# Altium PCB layout.PcbDoc (part 11 of 11)
Units mil, origin at the board's own origin, x right, y up, seen from the top; angles counter-clockwise.
Board outline 3543.31 x 3149.61 mil, 2 copper layers (Top Layer, Bottom Layer); 78 components, 73 nets, 327 pads, 143 vias.
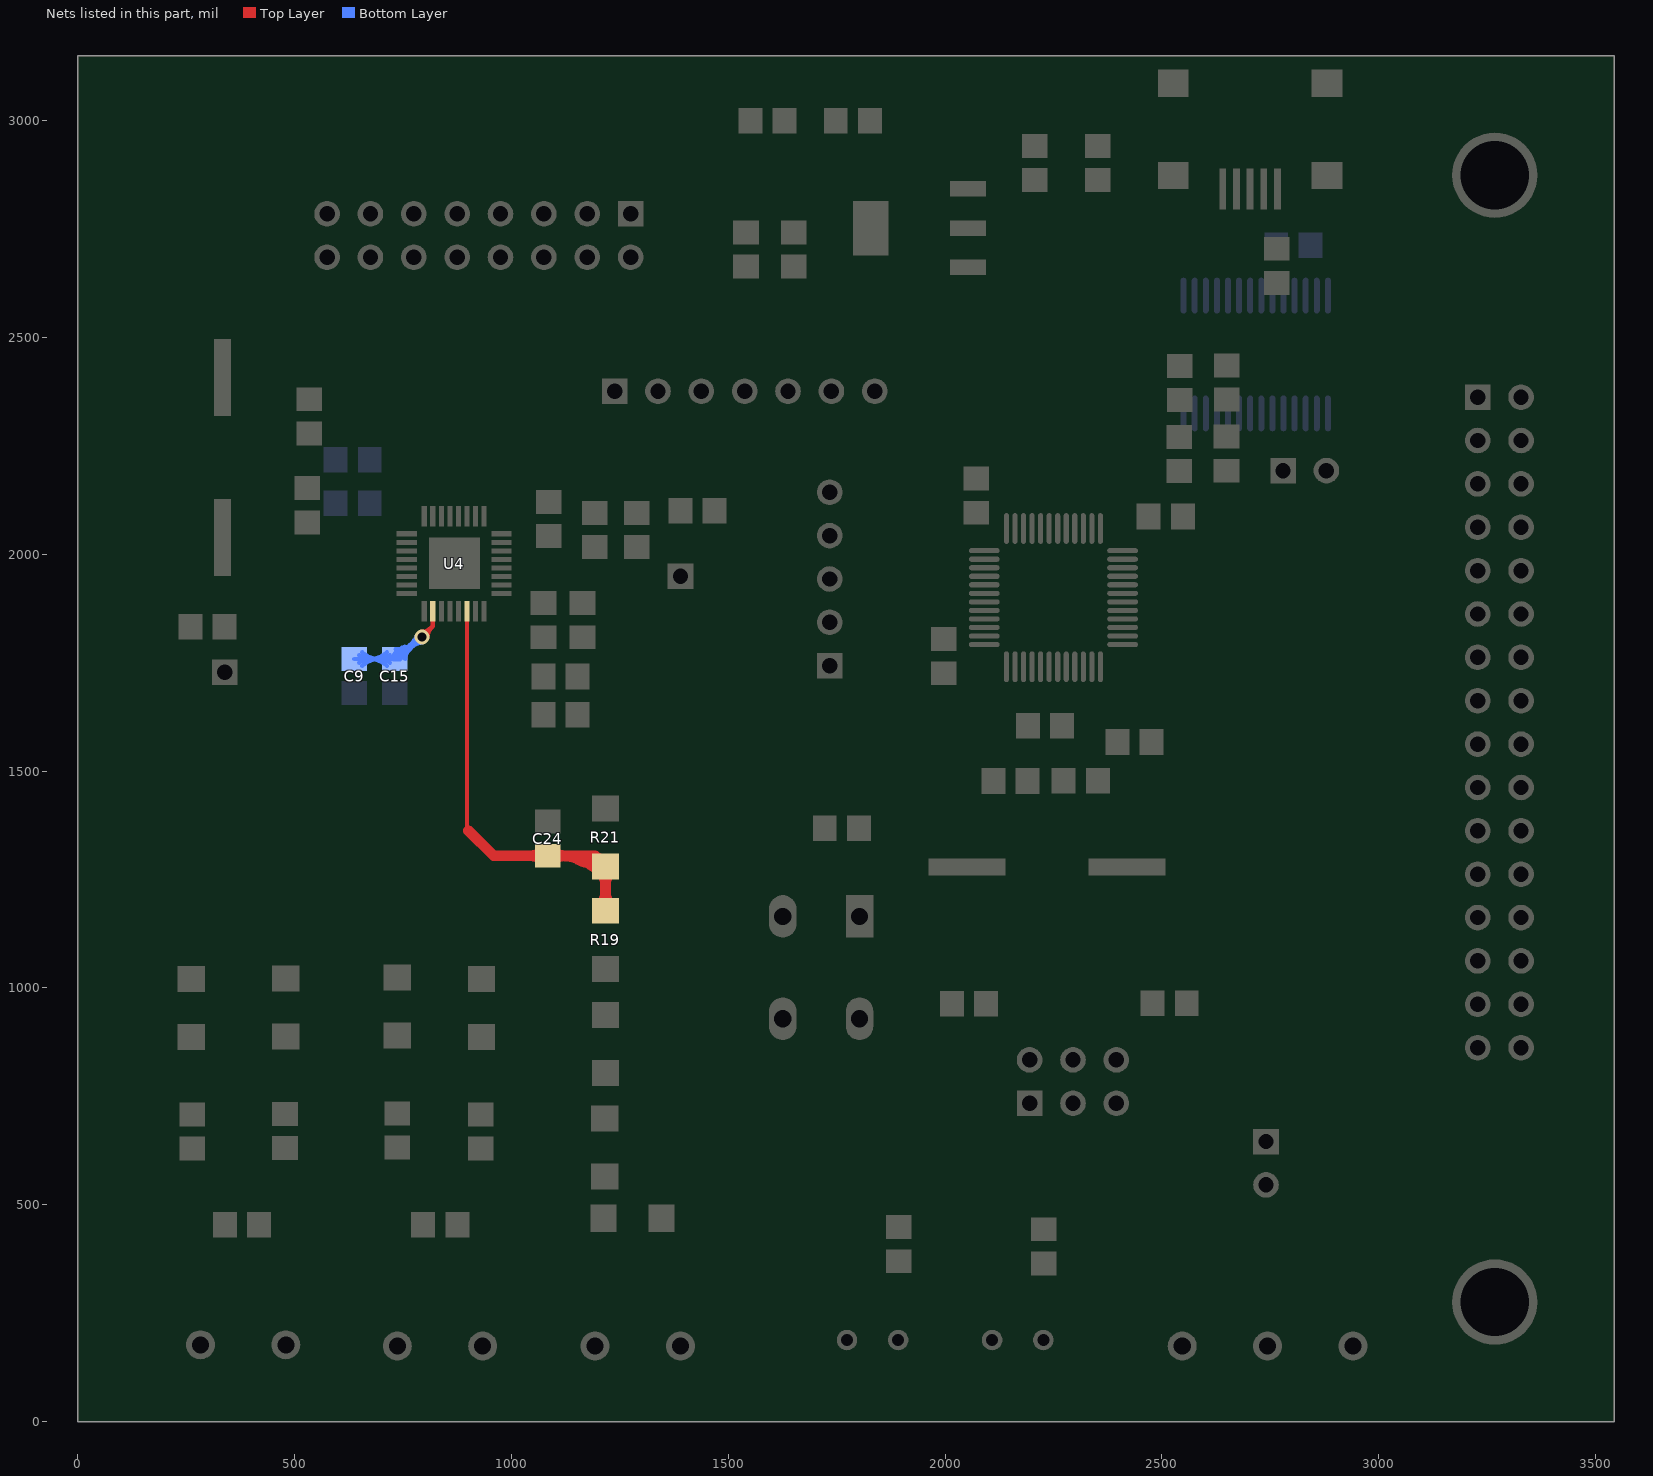
[diagram p11: the nets of this part, all layers, seen from the top]

## Via types
v1: diameter 35, hole 20, Top Layer to Bottom Layer, tented both sides, 113 vias
v2: diameter 35, hole 20, Top Layer to Bottom Layer, 28 vias
v3: diameter 35.43, hole 35.43, Top Layer to Bottom Layer, 2 vias

## Nets (pads, with @x,y where several pads share a name; then routed paths per layer and width w, separated by ;. In a path a pad name is that pad's centre, name@x,y a point inside that pad or via, vN(x,y) a via of type N, cw(c..) or ccw(c..) an arc to the next point about the centre after c; other vN are vias at no path point) (continued)
VAP: C24.1 R19.2 R21.2 U4.14 | length 3472.2
  Top Layer w10: 897.5,1371.05 U4.14@897.5,1869.06
  Top Layer w25: 901.32,1362.52 959.21,1304.63 C24.1@1084,1304.63 1192.51,1304.63 R21.2@1217,1280.14 R19.2@1217,1177.86 ; 1045.68,1304.63 cw(c1045.68,1268.27) C24.1@1071.38,1293.98 ; 1045.68,1304.63 ccw(c1045.68,1340.99) C24.1@1071.38,1315.28 ; 1045.68,1304.63 cw(c1045.68,1268.27) C24.1@1071.38,1293.98 ; 1045.68,1304.63 ccw(c1045.68,1340.99) C24.1@1071.38,1315.28 ; 1045.68,1304.63 cw(c1045.68,1268.27) C24.1@1071.38,1293.98 ; 1045.68,1304.63 ccw(c1045.68,1340.99) C24.1@1071.38,1315.28 ; 1045.68,1304.63 cw(c1045.68,1268.27) C24.1@1071.38,1293.98 ; 1045.68,1304.63 ccw(c1045.68,1340.99) C24.1@1071.38,1315.28 ; 1045.68,1304.63 cw(c1045.68,1268.27) C24.1@1071.38,1293.98 ; 1045.68,1304.63 ccw(c1045.68,1340.99) C24.1@1071.38,1315.28 ; C24.1@1096.62,1293.98 cw(c1122.32,1268.27) 1122.32,1304.63 ; C24.1@1096.62,1293.98 cw(c1122.32,1268.27) 1122.32,1304.63 ; C24.1@1096.62,1293.98 cw(c1122.32,1268.27) 1122.32,1304.63 ; C24.1@1096.62,1293.98 cw(c1122.32,1268.27) 1122.32,1304.63 ; C24.1@1096.62,1293.98 cw(c1122.32,1268.27) 1122.32,1304.63 ; C24.1@1096.62,1315.28 ccw(c1122.32,1340.99) 1122.32,1304.63 ; C24.1@1096.62,1315.28 ccw(c1122.32,1340.99) 1122.32,1304.63 ; C24.1@1096.62,1315.28 ccw(c1122.32,1340.99) 1122.32,1304.63 ; C24.1@1096.62,1315.28 ccw(c1122.32,1340.99) 1122.32,1304.63 ; C24.1@1096.62,1315.28 ccw(c1122.32,1340.99) 1122.32,1304.63 ; 1114.25,1304.63 cw(c1114.25,1178.96) R21.2@1203.11,1267.82 ; 1114.25,1304.63 cw(c1114.25,1178.96) R21.2@1203.11,1267.82 ; 1114.25,1304.63 cw(c1114.25,1178.96) R21.2@1203.11,1267.82 ; 1114.25,1304.63 cw(c1114.25,1178.96) R21.2@1203.11,1267.82 ; 1114.25,1304.63 cw(c1114.25,1178.96) R21.2@1203.11,1267.82 ; 1155.19,1295.49 ccw(c1181.18,1340.51) R21.2@1206.83,1295.29 ; 1155.19,1295.49 ccw(c1181.18,1340.51) R21.2@1206.83,1295.29 ; 1155.19,1295.49 ccw(c1181.18,1340.51) R21.2@1206.83,1295.29 ; 1155.19,1295.49 ccw(c1181.18,1340.51) R21.2@1206.83,1295.29 ; 1155.19,1295.49 ccw(c1181.18,1340.51) R21.2@1206.83,1295.29 ; 1155.19,1295.49 ccw(c1181.18,1340.51) R21.2@1206.83,1295.29 ; 1155.19,1295.49 ccw(c1181.18,1340.51) R21.2@1206.83,1295.29 ; 1155.19,1295.49 ccw(c1181.18,1340.51) R21.2@1206.83,1295.29 ; 1155.19,1295.49 ccw(c1181.18,1340.51) R21.2@1206.83,1295.29 ; 1155.19,1295.49 ccw(c1181.18,1340.51) R21.2@1206.83,1295.29 ; 1174.6,1304.63 cw(c1174.6,1239.32) R21.2@1220.78,1285.5 ; 1174.6,1304.63 cw(c1174.6,1239.32) R21.2@1220.78,1285.5 ; 1174.6,1304.63 cw(c1174.6,1239.32) R21.2@1220.78,1285.5 ; 1174.6,1304.63 cw(c1174.6,1239.32) R21.2@1220.78,1285.5 ; 1174.6,1304.63 cw(c1174.6,1239.32) R21.2@1220.78,1285.5 ; R19.2@1204.68,1190.18 ccw(c1174.94,1219.92) 1217,1219.92 ; R19.2@1204.68,1190.18 ccw(c1174.94,1219.92) 1217,1219.92 ; R19.2@1204.68,1190.18 ccw(c1174.94,1219.92) 1217,1219.92 ; R19.2@1204.68,1190.18 ccw(c1174.94,1219.92) 1217,1219.92 ; R19.2@1204.68,1190.18 ccw(c1174.94,1219.92) 1217,1219.92 ; R21.2@1204.68,1267.82 cw(c1174.94,1238.08) 1217,1238.08 ; R21.2@1204.68,1267.82 cw(c1174.94,1238.08) 1217,1238.08 ; R21.2@1204.68,1267.82 cw(c1174.94,1238.08) 1217,1238.08 ; R21.2@1204.68,1267.82 cw(c1174.94,1238.08) 1217,1238.08 ; R21.2@1204.68,1267.82 cw(c1174.94,1238.08) 1217,1238.08 ; 1217,1219.92 ccw(c1259.06,1219.92) R19.2@1229.32,1190.18 ; 1217,1219.92 ccw(c1259.06,1219.92) R19.2@1229.32,1190.18 ; 1217,1219.92 ccw(c1259.06,1219.92) R19.2@1229.32,1190.18 ; 1217,1219.92 ccw(c1259.06,1219.92) R19.2@1229.32,1190.18 ; 1217,1219.92 ccw(c1259.06,1219.92) R19.2@1229.32,1190.18 ; 1217,1238.08 cw(c1259.06,1238.08) R21.2@1229.32,1267.82 ; 1217,1238.08 cw(c1259.06,1238.08) R21.2@1229.32,1267.82 ; 1217,1238.08 cw(c1259.06,1238.08) R21.2@1229.32,1267.82 ; 1217,1238.08 cw(c1259.06,1238.08) R21.2@1229.32,1267.82 ; 1217,1238.08 cw(c1259.06,1238.08) R21.2@1229.32,1267.82
VDDOUT2P5: C9.1 C15.1 U4.10 | length 5372.4
  Top Layer w10: v2(794,1809) 818.76,1833.76 U4.10@818.76,1869.06 ; v2@793.5,1811.45 ccw(c788.71,1834.83) 811.77,1828.66 ; v2@793.5,1811.45 ccw(c788.71,1834.83) 811.77,1828.66 ; v2@793.5,1811.45 ccw(c788.71,1834.83) 811.77,1828.66 ; v2@793.5,1811.45 ccw(c788.71,1834.83) 811.77,1828.66 ; v2@793.5,1811.45 ccw(c788.71,1834.83) 811.77,1828.66 ; v2@793.5,1811.45 ccw(c788.71,1834.83) 811.77,1828.66 ; v2@793.5,1811.45 ccw(c788.71,1834.83) 811.77,1828.66 ; v2@793.5,1811.45 ccw(c788.71,1834.83) 811.77,1828.66 ; v2@793.5,1811.45 ccw(c788.71,1834.83) 811.77,1828.66 ; v2@793.5,1811.45 ccw(c788.71,1834.83) 811.77,1828.66 ; v2@794,1821.5 ccw(c794,1851.68) 815.34,1830.34 ; v2@794,1821.5 ccw(c794,1851.68) 815.34,1830.34 ; v2@794,1821.5 ccw(c794,1851.68) 815.34,1830.34 ; v2@794,1821.5 ccw(c794,1851.68) 815.34,1830.34 ; v2@794,1821.5 ccw(c794,1851.68) 815.34,1830.34 ; v2@796.45,1808.5 cw(c819.83,1803.71) 813.66,1826.77 ; v2@796.45,1808.5 cw(c819.83,1803.71) 813.66,1826.77 ; v2@796.45,1808.5 cw(c819.83,1803.71) 813.66,1826.77 ; v2@796.45,1808.5 cw(c819.83,1803.71) 813.66,1826.77 ; v2@796.45,1808.5 cw(c819.83,1803.71) 813.66,1826.77 ; v2@796.45,1808.5 cw(c819.83,1803.71) 813.66,1826.77 ; v2@796.45,1808.5 cw(c819.83,1803.71) 813.66,1826.77 ; v2@796.45,1808.5 cw(c819.83,1803.71) 813.66,1826.77 ; v2@796.45,1808.5 cw(c819.83,1803.71) 813.66,1826.77 ; v2@796.45,1808.5 cw(c819.83,1803.71) 813.66,1826.77 ; v2@806.5,1809 cw(c836.68,1809) 815.34,1830.34 ; v2@806.5,1809 cw(c836.68,1809) 815.34,1830.34 ; v2@806.5,1809 cw(c836.68,1809) 815.34,1830.34 ; v2@806.5,1809 cw(c836.68,1809) 815.34,1830.34 ; v2@806.5,1809 cw(c836.68,1809) 815.34,1830.34
  Bottom Layer w10: C9.1@638,1758.37 728,1758.37 C15.1@728.37,1758 ; C15.1@731,1758 743,1758 v2(794,1809) ; C9.1@648.85,1749.49 cw(c670.29,1728.05) 670.29,1758.37 ; C9.1@648.85,1749.49 cw(c670.29,1728.05) 670.29,1758.37 ; C9.1@648.85,1749.49 cw(c670.29,1728.05) 670.29,1758.37 ; C9.1@648.85,1749.49 cw(c670.29,1728.05) 670.29,1758.37 ; C9.1@648.85,1749.49 cw(c670.29,1728.05) 670.29,1758.37 ; C9.1@648.85,1767.25 ccw(c670.29,1788.69) 670.29,1758.37 ; C9.1@648.85,1767.25 ccw(c670.29,1788.69) 670.29,1758.37 ; C9.1@648.85,1767.25 ccw(c670.29,1788.69) 670.29,1758.37 ; C9.1@648.85,1767.25 ccw(c670.29,1788.69) 670.29,1758.37 ; C9.1@648.85,1767.25 ccw(c670.29,1788.69) 670.29,1758.37 ; C9.1@655.92,1742.42 cw(c694.43,1703.91) 694.43,1758.37 ; C9.1@655.92,1742.42 cw(c694.43,1703.91) 694.43,1758.37 ; C9.1@655.92,1742.42 cw(c694.43,1703.91) 694.43,1758.37 ; C9.1@655.92,1742.42 cw(c694.43,1703.91) 694.43,1758.37 ; C9.1@655.92,1742.42 cw(c694.43,1703.91) 694.43,1758.37 ; C9.1@655.92,1774.32 ccw(c694.43,1812.83) 694.43,1758.37 ; C9.1@655.92,1774.32 ccw(c694.43,1812.83) 694.43,1758.37 ; C9.1@655.92,1774.32 ccw(c694.43,1812.83) 694.43,1758.37 ; C9.1@655.92,1774.32 ccw(c694.43,1812.83) 694.43,1758.37 ; C9.1@655.92,1774.32 ccw(c694.43,1812.83) 694.43,1758.37 ; 674.57,1758.37 cw(c674.57,1703.91) C15.1@713.08,1742.42 ; 674.57,1758.37 ccw(c674.57,1812.83) C15.1@713.08,1774.32 ; 674.57,1758.37 cw(c674.57,1703.91) C15.1@713.08,1742.42 ; 674.57,1758.37 ccw(c674.57,1812.83) C15.1@713.08,1774.32 ; 674.57,1758.37 cw(c674.57,1703.91) C15.1@713.08,1742.42 ; 674.57,1758.37 ccw(c674.57,1812.83) C15.1@713.08,1774.32 ; 674.57,1758.37 cw(c674.57,1703.91) C15.1@713.08,1742.42 ; 674.57,1758.37 ccw(c674.57,1812.83) C15.1@713.08,1774.32 ; 674.57,1758.37 cw(c674.57,1703.91) C15.1@713.08,1742.42 ; 674.57,1758.37 ccw(c674.57,1812.83) C15.1@713.08,1774.32 ; 698.71,1758.37 cw(c698.71,1728.05) C15.1@720.15,1749.49 ; 698.71,1758.37 ccw(c698.71,1788.69) C15.1@720.15,1767.25 ; 698.71,1758.37 cw(c698.71,1728.05) C15.1@720.15,1749.49 ; 698.71,1758.37 ccw(c698.71,1788.69) C15.1@720.15,1767.25 ; 698.71,1758.37 cw(c698.71,1728.05) C15.1@720.15,1749.49 ; 698.71,1758.37 ccw(c698.71,1788.69) C15.1@720.15,1767.25 ; 698.71,1758.37 cw(c698.71,1728.05) C15.1@720.15,1749.49 ; 698.71,1758.37 ccw(c698.71,1788.69) C15.1@720.15,1767.25 ; 698.71,1758.37 cw(c698.71,1728.05) C15.1@720.15,1749.49 ; 698.71,1758.37 ccw(c698.71,1788.69) C15.1@720.15,1767.25 ; C15.1@725.97,1760.89 cw(c764.39,1747.08) 753.82,1786.52 ; C15.1@725.97,1760.89 cw(c764.39,1747.08) 753.82,1786.52 ; C15.1@725.97,1760.89 cw(c764.39,1747.08) 753.82,1786.52 ; C15.1@725.97,1760.89 cw(c764.39,1747.08) 753.82,1786.52 ; C15.1@725.97,1760.89 cw(c764.39,1747.08) 753.82,1786.52 ; C15.1@725.97,1760.89 cw(c764.39,1747.08) 753.82,1786.52 ; C15.1@725.97,1760.89 cw(c764.39,1747.08) 753.82,1786.52 ; C15.1@725.97,1760.89 cw(c764.39,1747.08) 753.82,1786.52 ; C15.1@725.97,1760.89 cw(c764.39,1747.08) 753.82,1786.52 ; C15.1@725.97,1760.89 cw(c764.39,1747.08) 753.82,1786.52 ; C15.1@732.97,1770.93 ccw(c732.97,1826.36) 772.16,1787.16 ; C15.1@732.97,1770.93 ccw(c732.97,1826.36) 772.16,1787.16 ; C15.1@732.97,1770.93 ccw(c732.97,1826.36) 772.16,1787.16 ; C15.1@732.97,1770.93 ccw(c732.97,1826.36) 772.16,1787.16 ; C15.1@732.97,1770.93 ccw(c732.97,1826.36) 772.16,1787.16 ; C15.1@732.97,1780.93 ccw(c732.97,1860.5) v2@789.24,1804.24 ; C15.1@732.97,1780.93 ccw(c732.97,1860.5) v2@789.24,1804.24 ; C15.1@732.97,1780.93 ccw(c732.97,1860.5) v2@789.24,1804.24 ; C15.1@732.97,1780.93 ccw(c732.97,1860.5) v2@789.24,1804.24 ; C15.1@732.97,1780.93 ccw(c732.97,1860.5) v2@789.24,1804.24 ; C15.1@735.38,1757.5 cw(c786.28,1739.21) 772.28,1791.46 ; C15.1@735.38,1757.5 cw(c786.28,1739.21) 772.28,1791.46 ; C15.1@735.38,1757.5 cw(c786.28,1739.21) 772.28,1791.46 ; C15.1@735.38,1757.5 cw(c786.28,1739.21) 772.28,1791.46 ; C15.1@735.38,1757.5 cw(c786.28,1739.21) 772.28,1791.46 ; C15.1@735.38,1757.5 cw(c786.28,1739.21) 772.28,1791.46 ; C15.1@735.38,1757.5 cw(c786.28,1739.21) 772.28,1791.46 ; C15.1@735.38,1757.5 cw(c786.28,1739.21) 772.28,1791.46 ; C15.1@735.38,1757.5 cw(c786.28,1739.21) 772.28,1791.46 ; C15.1@735.38,1757.5 cw(c786.28,1739.21) 772.28,1791.46 ; C15.1@744.25,1777.91 ccw(c750.77,1789.2) C15.1@754.15,1776.6 ; C15.1@744.25,1777.91 ccw(c750.77,1789.2) C15.1@754.15,1776.6 ; C15.1@744.25,1777.91 ccw(c750.77,1789.2) C15.1@754.15,1776.6 ; C15.1@744.25,1777.91 ccw(c750.77,1789.2) C15.1@754.15,1776.6 ; C15.1@744.25,1777.91 ccw(c750.77,1789.2) C15.1@754.15,1776.6 ; C15.1@744.25,1777.91 ccw(c750.77,1789.2) C15.1@754.15,1776.6 ; C15.1@744.25,1777.91 ccw(c750.77,1789.2) C15.1@754.15,1776.6 ; C15.1@744.25,1777.91 ccw(c750.77,1789.2) C15.1@754.15,1776.6 ; C15.1@744.25,1777.91 ccw(c750.77,1789.2) C15.1@754.15,1776.6 ; C15.1@744.25,1777.91 ccw(c750.77,1789.2) C15.1@754.15,1776.6 ; C15.1@755.53,1758.37 cw(c784.88,1758.37) 764.12,1779.12 ; C15.1@755.53,1758.37 cw(c784.88,1758.37) 764.12,1779.12 ; C15.1@755.53,1758.37 cw(c784.88,1758.37) 764.12,1779.12 ; C15.1@755.53,1758.37 cw(c784.88,1758.37) 764.12,1779.12 ; C15.1@755.53,1758.37 cw(c784.88,1758.37) 764.12,1779.12 ; 765.09,1790.3 ccw(c747.03,1821.59) v2@781.93,1812.24 ; 765.09,1790.3 ccw(c747.03,1821.59) v2@781.93,1812.24 ; 765.09,1790.3 ccw(c747.03,1821.59) v2@781.93,1812.24 ; 765.09,1790.3 ccw(c747.03,1821.59) v2@781.93,1812.24 ; 765.09,1790.3 ccw(c747.03,1821.59) v2@781.93,1812.24 ; 765.09,1790.3 ccw(c747.03,1821.59) v2@781.93,1812.24 ; 765.09,1790.3 ccw(c747.03,1821.59) v2@781.93,1812.24 ; 765.09,1790.3 ccw(c747.03,1821.59) v2@781.93,1812.24 ; 765.09,1790.3 ccw(c747.03,1821.59) v2@781.93,1812.24 ; 765.09,1790.3 ccw(c747.03,1821.59) v2@781.93,1812.24 ; 765.09,1790.3 ccw(c747.03,1821.59) v2@781.93,1812.24 ; 765.09,1790.3 ccw(c747.03,1821.59) v2@781.93,1812.24 ; 765.09,1790.3 ccw(c747.03,1821.59) v2@781.93,1812.24 ; 765.09,1790.3 ccw(c747.03,1821.59) v2@781.93,1812.24 ; 765.09,1790.3 ccw(c747.03,1821.59) v2@781.93,1812.24 ; 772.38,1794.51 cw(c784.5,1773.53) v2@790.76,1796.93 ; 772.38,1794.51 cw(c784.5,1773.53) v2@790.76,1796.93 ; 772.38,1794.51 cw(c784.5,1773.53) v2@790.76,1796.93 ; 772.38,1794.51 cw(c784.5,1773.53) v2@790.76,1796.93 ; 772.38,1794.51 cw(c784.5,1773.53) v2@790.76,1796.93 ; 772.38,1794.51 cw(c784.5,1773.53) v2@790.76,1796.93 ; 772.38,1794.51 cw(c784.5,1773.53) v2@790.76,1796.93 ; 772.38,1794.51 cw(c784.5,1773.53) v2@790.76,1796.93 ; 772.38,1794.51 cw(c784.5,1773.53) v2@790.76,1796.93 ; 772.38,1794.51 cw(c784.5,1773.53) v2@790.76,1796.93 ; 772.38,1794.51 cw(c784.5,1773.53) v2@790.76,1796.93 ; 772.38,1794.51 cw(c784.5,1773.53) v2@790.76,1796.93 ; 772.38,1794.51 cw(c784.5,1773.53) v2@790.76,1796.93 ; 772.38,1794.51 cw(c784.5,1773.53) v2@790.76,1796.93 ; 772.38,1794.51 cw(c784.5,1773.53) v2@790.76,1796.93 ; 772.66,1787.66 cw(c794,1766.32) v2@794,1796.5 ; 772.66,1787.66 ccw(c751.32,1809) v2@781.5,1809 ; 772.66,1787.66 cw(c794,1766.32) v2@794,1796.5 ; 772.66,1787.66 ccw(c751.32,1809) v2@781.5,1809 ; 772.66,1787.66 cw(c794,1766.32) v2@794,1796.5 ; 772.66,1787.66 ccw(c751.32,1809) v2@781.5,1809 ; 772.66,1787.66 cw(c794,1766.32) v2@794,1796.5 ; 772.66,1787.66 ccw(c751.32,1809) v2@781.5,1809 ; 772.66,1787.66 cw(c794,1766.32) v2@794,1796.5 ; 772.66,1787.66 ccw(c751.32,1809) v2@781.5,1809 ; 774.97,1800.19 cw(c787.85,1792.75) v2@793.11,1806.66 ; 774.97,1800.19 cw(c787.85,1792.75) v2@793.11,1806.66 ; 774.97,1800.19 cw(c787.85,1792.75) v2@793.11,1806.66 ; 774.97,1800.19 cw(c787.85,1792.75) v2@793.11,1806.66 ; 774.97,1800.19 cw(c787.85,1792.75) v2@793.11,1806.66 ; 774.97,1800.19 cw(c787.85,1792.75) v2@793.11,1806.66 ; 774.97,1800.19 cw(c787.85,1792.75) v2@793.11,1806.66 ; 774.97,1800.19 cw(c787.85,1792.75) v2@793.11,1806.66 ; 774.97,1800.19 cw(c787.85,1792.75) v2@793.11,1806.66 ; 774.97,1800.19 cw(c787.85,1792.75) v2@793.11,1806.66 ; 774.97,1800.19 cw(c787.85,1792.75) v2@793.11,1806.66 ; 774.97,1800.19 cw(c787.85,1792.75) v2@793.11,1806.66 ; 774.97,1800.19 cw(c787.85,1792.75) v2@793.11,1806.66 ; 774.97,1800.19 cw(c787.85,1792.75) v2@793.11,1806.66 ; 774.97,1800.19 cw(c787.85,1792.75) v2@793.11,1806.66 ; 774.97,1800.19 cw(c787.85,1792.75) v2@793.11,1806.66 ; 774.97,1800.19 cw(c787.85,1792.75) v2@793.11,1806.66 ; 774.97,1800.19 cw(c787.85,1792.75) v2@793.11,1806.66 ; 774.97,1800.19 cw(c787.85,1792.75) v2@793.11,1806.66 ; 774.97,1800.19 cw(c787.85,1792.75) v2@793.11,1806.66
pads on no net: P1.4 P1.6 P1.7 P1.8 P1.9 P6.22 P6.24 P6.26 P6.28 P6.30 U1.2 U1.3 U1.4 U1.19 U1.29 U1.38 U1.45 U1.46 U3.2 U3.3 U3.6 U3.8 U3.9 U3.10 U3.11 U3.12 U3.13 U3.14 U3.19 U3.24 U3.27 U3.28 U4.33
copper on no net:
  other v3: 2616.95,2983.61 2790.17,2983.61

## Polygon pours and split planes (outlines as drawn)
GND on Bottom Layer "Bottom Layer-GND" (solid, pour order 11): 0,3149.61 0,0 3543.31,0 3543.31,3149.61
GND on Top Layer "Top Layer-GND" (solid, pour order 13): 0,3149.61 0,0 3543.31,0 3543.31,3149.61

## Other copper
Top Layer:
  pour cut-out: 1062.99,0 1065,123 1159,123 1254,121 1255,229 1157,230 1062.99,230.65 1062.99,590.55 1496.06,590.55 1535.43,551.18 1535.43,0
  region net VAMS: 887,1349 975,1261 1164,1261 1166,1259 1162,1255 1162,650 1141,629 1038,629 1001,666 1001,1107 961,1107 859,1209 860,1210 860,1342 867,1349
  region net VAN: 911,1809 912,1808 912,1380 945,1345 1260,1345 1268,1333 1268,645 1283,630 1352,630 1388,666 1388,1453 1352,1489 1047,1489 1047,1490 951,1586 951,1785 927,1809
  region net 3.3V: 1779,2825 1893,2825 1939,2779 1940,2780 2110,2780 2110,2725 1940,2725 1892,2677 1781,2677 1779,2679
Bottom Layer:
  pour cut-out: 1062.99,0 1063,120 1146,120 1250,122 1251,224 1062.99,226.79 1062.99,590.55 1496.06,590.55 1535.43,551.18 1535.43,0

## Silkscreen, mask and mechanical layers (free items; w line width, h text height)
Top Overlay:
  lines w7.87: 2474,2443 2491,2443 ; 2699,2445 2716,2445
Top Solder:
  lines w7.87: 878,1867 878,1347 973,1252 1152,1252 1155,1249 1155,656 ; 916,1859 916,1383 916,1380 947,1349 1018,1349 1019,1349 1041,1371 1041,1410 ; 1125,1413 1158,1413 1173,1428 1173,1444 ; 1262,1448 1262,1352 1275,1339 1275,661
Mechanical 1:
  the board outline again, w3.94

## Text inside footprints (layer, text, board x,y; h text height)
P2: Top Overlay "6" at 2455,814 h50; Top Overlay "5" at 2455,714 h50; Top Overlay "2" at 2095,814 h50; Top Overlay "1" at 2115,714 h50
P6: Top Overlay "2" at 3308.35,2462.2 h50 r270; Top Overlay "1" at 3208.35,2462.2 h50 r270; Top Overlay "31" at 3208.35,802.2 h50 r270; Top Overlay "32" at 3308.35,802.2 h50 r270
P8: Top Overlay "2" at 1375,2705 h50 r180; Top Overlay "1" at 1375,2805 h50 r180; Top Overlay "15" at 515,2805 h50 r180; Top Overlay "16" at 515,2705 h50 r180